# Altium PCB T12 holder part1.PcbDoc
Units mil, origin at the board's own origin, x right, y up, seen from the top; angles counter-clockwise.
Board outline 2915.05 x 552.21 mil, 2 copper layers (Top Layer, Bottom Layer); 1 components, 3 nets, 6 pads, 0 vias.
Unrouted connection lines stored in the file: 1.
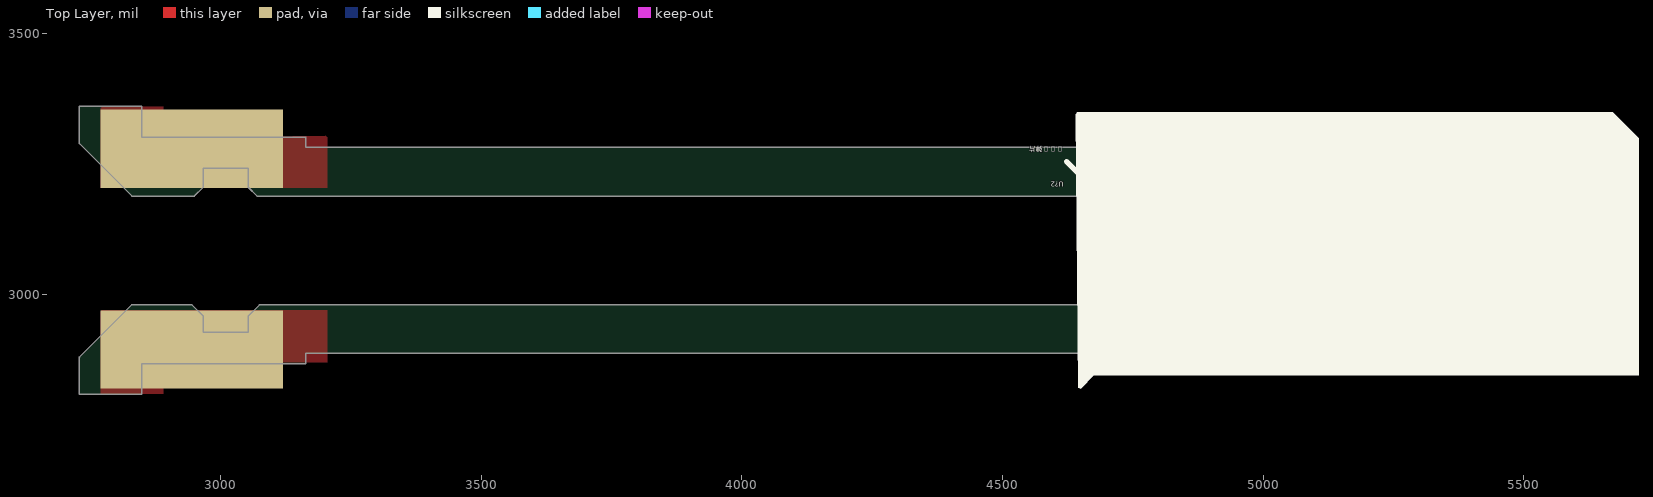
[diagram p0: Top Layer view]
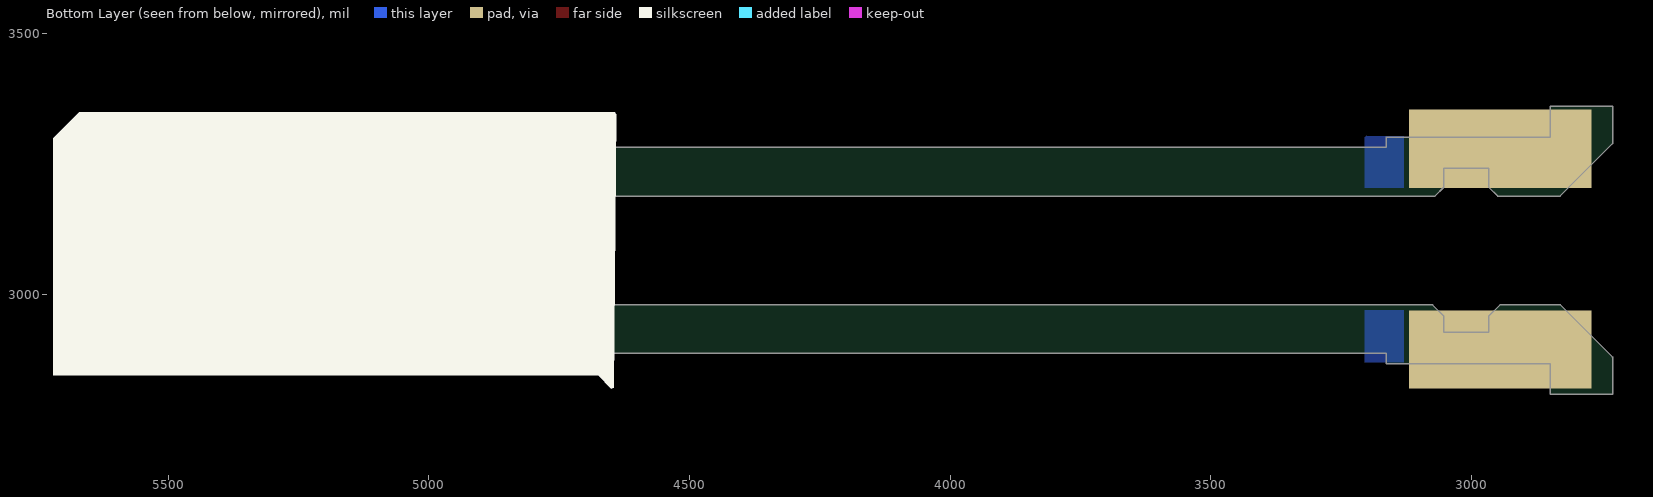
[diagram p1: Bottom Layer view, seen from below]

## Layer stack, top to bottom
Top Solder: solder mask 0.4, Solder Resist, Dk 3.5
Top Layer: signal copper 1.4
Dielectric 1: dielectric 12.6, FR-4, Dk 4.8
Bottom Layer: signal copper 1.4
Bottom Solder: solder mask 0.4, Solder Resist, Dk 3.5

## Board outline
2729.49,2809.41 2729.49,2880 cw(c2730,2880) 2729.64,2880.36 2829.64,2980.36 cw(c2830,2980) 2830,2980.51 2945,2980.51 cw(c2945,2980) 2945.36,2980.36 2967.21,2958.51 cw(c2966.85,2958.15) 2967.37,2958.15 2967.37,2928.03 3052.95,2928.03 3052.95,2958.46 cw(c3053.46,2958.46) 3053.1,2958.83 3074.64,2980.36 cw(c3075,2980) 3075,2980.51 5525.39,2980.51 5525.39,3043.66 cw(c5525.91,3043.66) 5525.91,3044.18 5584.45,3044.18 5584.45,3186.85 5525.91,3186.85 cw(c5525.91,3187.36) 5525.39,3187.36 5525.39,3188.82 3070.67,3188.82 cw(c3070.67,3189.33) 3070.31,3188.97 3053.1,3206.17 cw(c3053.46,3206.54) 3052.95,3206.54 3052.95,3241.97 2967.37,3241.97 2967.37,3206.85 cw(c2966.85,3206.85) 2967.21,3206.49 2949.69,3188.97 cw(c2949.33,3189.33) 2949.33,3188.82 2830.67,3188.82 cw(c2830.67,3189.33) 2830.31,3188.97 2729.64,3289.64 cw(c2730,3290) 2729.49,3290 2729.49,3360.59 cw(c2730,3360.59) 2730,3361.11 2848.11,3361.11 cw(c2848.11,3360.59) 2848.63,3360.59 2848.63,3302.05 3163.07,3302.05 cw(c3163.07,3301.54) 3163.59,3301.54 3163.59,3282.37 5644.02,3282.37 cw(c5644.02,3281.85) 5644.53,3281.85 5644.53,2888.15 cw(c5644.02,2888.15) 5644.02,2887.63 3163.59,2887.63 3163.59,2868.46 cw(c3163.07,2868.46) 3163.07,2867.95 2848.63,2867.95 2848.63,2809.41 cw(c2848.11,2809.41) 2848.11,2808.89 2730,2808.89 cw(c2730,2809.41)

## Design rules (kind name [scope] priority, off if disabled: settings)
Clearance [All] p1: gap=10 ignorepadtopadclearanceinfootprint=FALSE except(0: Arc-Hole Track-Hole SMDPad-Hole THPad-Hole Via-Hole Fill-Hole Poly-Hole Region-Hole Text-Hole)
PolygonConnect PolygonConnect_1 [All vs IsNamedPolygon('Top Layer-fixed') Or  IsNamedPolygon('Top Layer-fixed 1') Or  IsNamedPolygon('Top Layer-fixed') Or  IsNamedPolygon('Top Layer-fixed 1')] p1: connectstyle=Direct reliefconductorwidth=10 reliefentries=4 polygonreliefangle="90 Angle" airgapwidth=10
PolygonConnect [All] p2: connectstyle=Relief reliefconductorwidth=10 reliefentries=4 polygonreliefangle="90 Angle" airgapwidth=10
RoutingVias [All] p1: holewidth=28 width=50 viastyle="Through Hole" minholewidth=28 minwidth=50 maxholewidth=28 maxwidth=50
SolderMaskExpansion [All] p1: expansion=4
Width [All] p1: maxlimit=100 minlimit=10 preferedwidth=10 minimp=50.000000 maximp=50.000000 favimp=50.000000
30 further rules are at their usual default settings.

## Components (designator, comment, footprint, x,y, rotation, side; value= is the part's Value field where it differs from the comment)
U?2 "T12弹片" ? 4896.77,3250 r180 top (schematic designator U?)

## Footprints (in the part's own frame and the unit in brackets; to place one, negate y for a bottom-side part, rotate by r counter-clockwise, add the part's x,y. Pads: shape width x height; smd on the part's side, far side on the other; paste and mask are expansions set on the pad)
? [mm]
  oval 2x1.7 hole 1.2: 1(-6.093,0)
  oval 2x1.7 hole 1.2 slot 1.205 at 0 deg: 1(-3.003,0)
  silkscreen extent -1.53,-0.54 6.97,0.63

## Free pads (board coordinates)
  rect 350x150 all layers, no hole: 5(2945,2895) 5(2945,3280)
  rect 130x150 hole 45: 6(5595,3205) 7(5595,2965)

## Nets (pads, with @x,y where several pads share a name; then routed paths per layer and width w, separated by ;. In a path a pad name is that pad's centre, name@x,y a point inside that pad or via, vN(x,y) a via of type N, cw(c..) or ccw(c..) an arc to the next point about the centre after c; other vN are vias at no path point)
fixed: pad.5
GND: pad.6 U?2.1 | length 1234.3
  Top Layer w10: U?2.1@5015,3250 U?2.1@5016.26,3245
  Top Layer w80: U?2.1@4995,3255 pad.6@5595,3255
  Bottom Layer w80: U?2.1@4995,3255 5595,3255 pad.6@5610,3230
P+: pad.7

## Polygon pours and split planes (outlines as drawn)
fixed on Top Layer "Top Layer-fixed" (solid, pour order 4): 3205,2870 3205,2970 2772.5,2970 2770,2967.5 2770,2810 2890,2810 2890,2870
fixed on Top Layer "Top Layer-fixed 1" (solid, pour order 2): 3205,3305 3205,3205 2770,3205 2770,3365 2775,3360 2890,3360 2890,3300
no net on Bottom Layer "Top Layer-fixed" (solid, pour order 8): 3205,2870 3205,2970 2772.5,2970 2770,2967.5 2770,2810 2890,2810 2890,2870
no net on Bottom Layer "Top Layer-fixed 1" (solid, pour order 6): 3205,3305 3205,3205 2770,3205 2770,3365 2775,3360 2890,3360 2890,3300
no net on Top Overlay (solid): 4640,3350 5670,3350 5720,3300 5720,2845 4675,2845 4645,2815
no net on Bottom Overlay (solid): 4640,3350 5670,3350 5720,3300 5720,2845 4675,2845 4645,2815

## Silkscreen, mask and mechanical layers (free items; w line width, h text height)
Mechanical 2:
  lines w1: 3065,3195 3070.67,3189.33 ; 3070.67,3189.33 5525.91,3189.33 5525.91,3187.36 5584.96,3187.36 5584.96,3043.66 5525.91,3043.66 5525.91,2980 3075,2980 3053.46,2958.46 3053.46,2927.52 2966.85,2927.52 2966.85,2958.15 2945,2980 2830,2980 2730,2880 2730,2809.41 2848.11,2809.41 2848.11,2868.46 3163.07,2868.46 3163.07,2888.15 5644.02,2888.15 5644.02,3281.85 3163.07,3281.85 3163.07,3301.54 2848.11,3301.54 2848.11,3360.59 2730,3360.59 2730,3290 2830.67,3189.33 2949.33,3189.33 2966.85,3206.85 2966.85,3242.48 3053.46,3242.48 3053.46,3206.54 3070.67,3189.33